# Altium PCB leo_power_pcb.PcbDoc (part 2 of 3)
Units mm, origin at the board's own origin, x right, y up, seen from the top; angles counter-clockwise.
Board outline 127 x 85.5 mm, 4 copper layers (TOP_Layer, INT1_GND, INT2_GND, BOTTOM_Layer), stack 1.586 mm thick; 172 components, 108 nets, 524 pads, 275 vias.
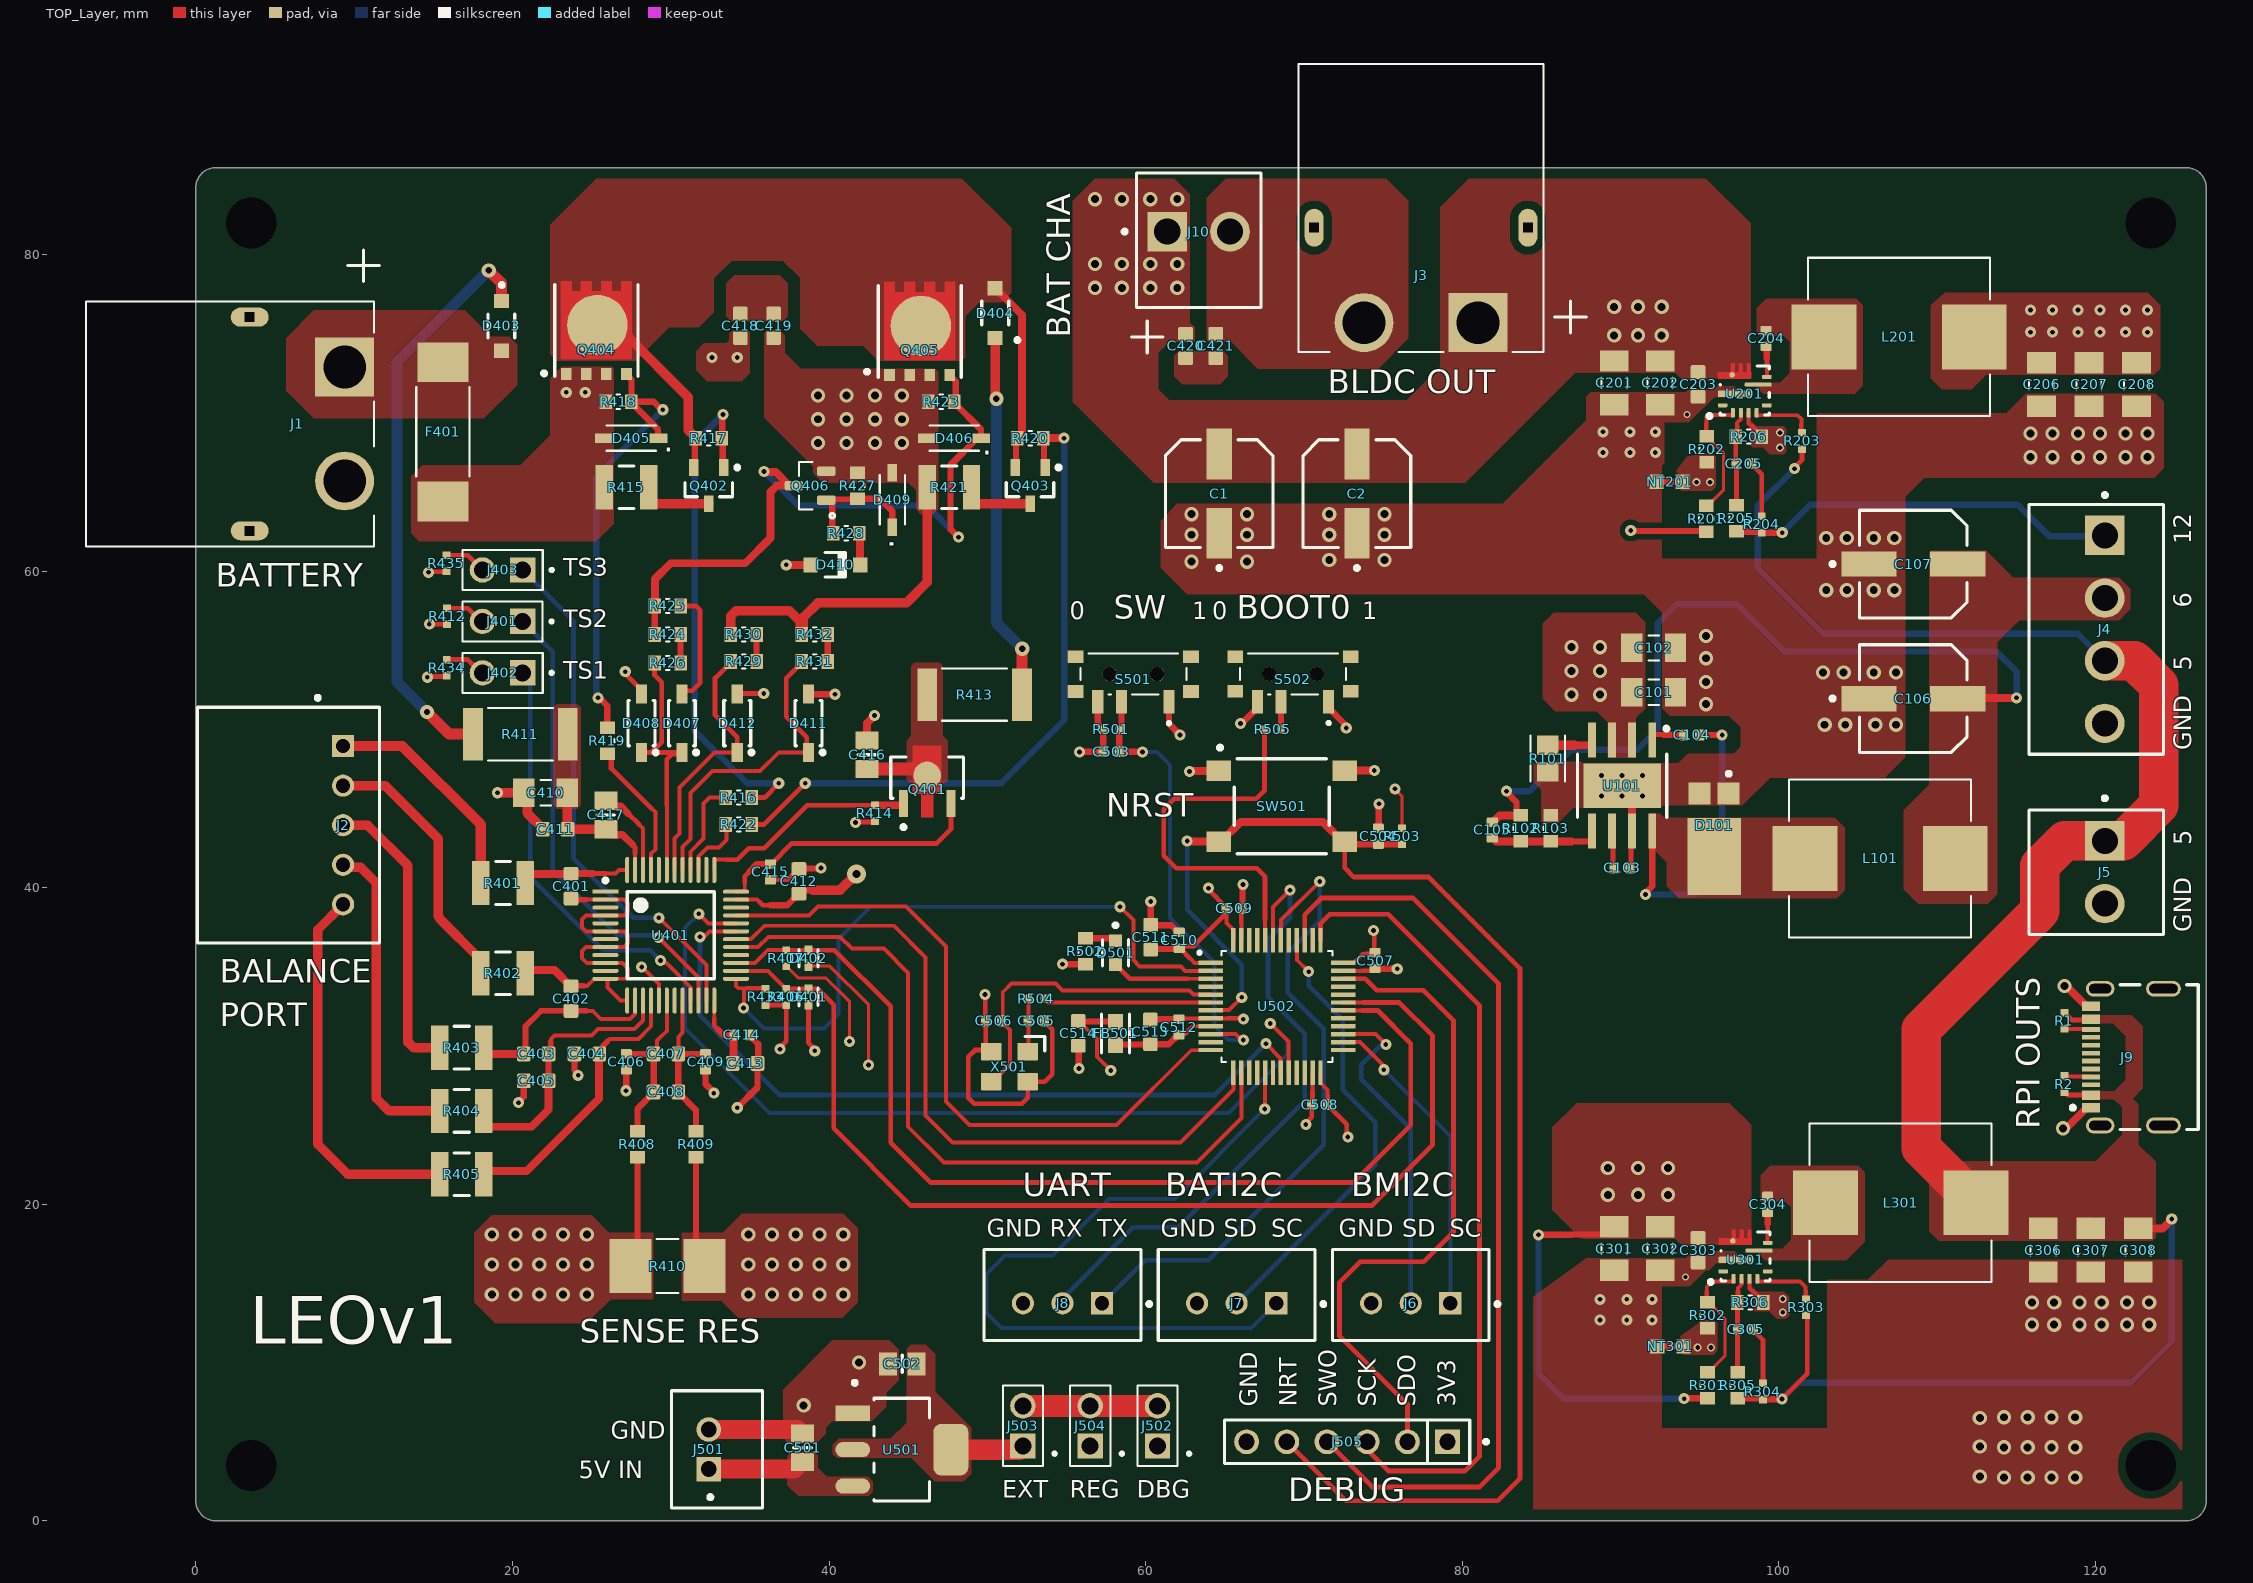
[diagram p0: TOP_Layer view]

## Part data (continued)
U201 U301: "Buck Switching Regulator IC Adjustable 0.6V~13V 1 Output 6A VQFN-10-HR(3x3)", Manufacturer="Texas Instruments", Max Junction Temp=+150°C, Max Supply Voltage=28V, Min Supply Voltage=4.5V, Nominal Supply Current=140uA, Output Current=6A, Output Voltage=0.6-13V, Package=RPA0010A, Switching Frequency=500kHz, Temperature="-40°C to +150°C", Temperature Range Low=-40°C, Automotive=No, Category=IC, ComponentLink2Description=Datasheet, ComponentLink2URL=http://www.ti.com/lit/ds/symlink/tps56637.pdf, Device Class L1="Integrated Circuits (ICs)", Device Class L2="Power Management ICs", Device Class L3="Voltage Regulators - Switching", Digikey Description="IC POWER MANAGEMENT", Height=1mm, Lead Free=Yes, Manufacturer Part Number=TPS56637RPAR, Max Duty Cycle=91%, Number Of Outputs=1, Octopart=https://octopart.com/tps56637rpar-texas+instruments-97650653, Output Type=AdjustableProgrammable, RoHS=TRUE, Standoff Height=0mm, Switching Topology=Buck, Temperature Range High=+150°C
U401: "High-precision series battery monitor and protector for 3 to 10 cells of lithium-ion, lithium-polymer, and lithium iron phosphate battery packs"
U501: library part LDO_LDL1117S33R, "IC REG LINEAR 3.3V 1.2A SOT223", Dropout Voltage=350mV, Manufacturer=STMicroelectronics, Max Junction Temp=+125°C, Max Supply Voltage=18V, Min Supply Voltage=2.6V, Nominal Supply Current=250uA, Output Current=2A, Output Voltage=3.3V, Package=SOT223-0046067, Temperature="-40°C to +125°C", Temperature Range Low=-40°C, Accuracy Percentage=2%, Automotive=No, Category=IC, ComponentLink2Description=Datasheet, ComponentLink2URL=https://www.st.com/resource/en/datasheet/ldl1117.pdf, Device Class L1="Integrated Circuits (ICs)", Device Class L2="Power Management ICs", Device Class L3="Voltage Regulators - Linear", Digikey Description="IC REG LINEAR 3.3V 1.2A SOT223", Height=1.9mm, Ipc Land Pattern Name=SOT230P700X190-4, Lead Free=Yes, Manufacturer Part Number=LDL1117S33R, Mouser Description="LDL1117 Series 1.2 A 3.3 V High PSRR LDO Linear Voltage Regulator-SOT-223", Number Of Outputs=1, Octopart=https://octopart.com/ldl1117s33r-stmicroelectronics-81876163, Output Type=Fixed, RoHS=TRUE, Standoff Height=0.02mm, Temperature Range High=+125°C
U502: "ARMÂ® CortexÂ®-M4 STM32L4 Microcontroller IC 32-Bit Single-Core 80MHz 256KB (256K x 8) FLASH 48-LQFP (7x7)", Package="LQFP-48 STMicroelectronics", Check_prices=https://www.snapeda.com/parts/STM32L431CCT6/STMicroelectronics/view-part/?ref=eda, MF=STMicroelectronics, MP=STM32L431CCT6, SnapEDA_Link=https://www.snapeda.com/parts/STM32L431CCT6/STMicroelectronics/view-part/?ref=snap
X501: library part TSX-3225_24.0000MF15X-AC, "Crystal SMD 24MHz 10PPM 7pF 3225", Manufacturer=Epson, Manufacturer Part Number="TSX-3225 24.0000MF15X-AC"

## Free pads (board coordinates)
  round 1.524 hole 3.2: MH(3.5,3.5) MH(3.5,82) MH(123.5,3.5) MH(123.5,82)

## Via types
v1: diameter 0.9, hole 0.5, TOP_Layer to BOTTOM_Layer, 147 vias
v2: diameter 0.7, hole 0.3, TOP_Layer to BOTTOM_Layer, 107 vias
v3: diameter 0.5, hole 0.3, TOP_Layer to BOTTOM_Layer, 8 vias
v4: diameter 0.63, hole 0.33, TOP_Layer to BOTTOM_Layer, 6 vias
v5: diameter 0.9, hole 0.4, TOP_Layer to BOTTOM_Layer, 4 vias
v6: diameter 0.45, hole 0.25, TOP_Layer to BOTTOM_Layer, 2 vias
v7: diameter 1.2, hole 0.5, TOP_Layer to BOTTOM_Layer, 1 vias

## Nets (pads, with @x,y where several pads share a name; then routed paths per layer and width w, separated by ;. In a path a pad name is that pad's centre, name@x,y a point inside that pad or via, vN(x,y) a via of type N, cw(c..) or ccw(c..) an arc to the next point about the centre after c; other vN are vias at no path point)
+3V3: C507.2 C508.2 C509.2 C510.2 C511.2 C514.2 FB501.2 J502.2 J503.2 J504.2 R503.2 S501.1 S502.1 U502.1 U502.24 U502.36 U502.48 | length 138.9
  TOP_Layer w0.2: v2(75.75,46.25) 75.75,46.231 76.2,45.781 R503.2@76.2,43.762
  TOP_Layer w0.25: C514.2@55.75,31.58 55.78,31.58 55.807,31.553 56.925,30.435 56.925,29.325 v2(57.8,28.45) ; 62.825,35.525 63.1,35.25 U502.1@64.12,35.25 ; 65.1,38.075 65.1,37.77 65.55,37.32 U502.48@65.55,36.68 ; U502.24@71.05,28.32 71.05,27.68 71.5,27.23 71.5,26.875 ; U502.36@72.48,35.25 73.12,35.25 73.695,35.825 73.925,35.825
  TOP_Layer w0.3: C510.2@62.125,36.175 62.275,36.325 63.05,36.325 C509.2@65.1,38.375 ; C510.2@62.215,36.135 62.825,35.525 ; v2(63.975,39.975) 63.975,39.875 65.1,38.75 C509.2@65.1,38.7 C509.2@65.1,38.375 ; 65.1,38.075 C509.2@65.1,38.375 ; 71.5,26.875 C508.2@71.5,26.3 71.5,26.25 72.7,25.05 72.7,24.325 v2(72.775,24.25) ; 73.925,35.825 74.425,35.825 C507.2@74.5,35.9 74.45,35.95 74.45,37.25 v2(74.4,37.3)
  TOP_Layer w0.4: C514.2@55.807,31.553 58.073,31.553 FB501.2@58.1,31.526 ; C511.2@60.325,36.095 60.365,36.135 C510.2@62.085,36.135 ; S501.1@61.475,51.75 61.475,50.35 v2(62.175,49.65) ; S502.1@71.56,51.754 71.56,51.354 72.618,50.296 72.618,50.157 v2(72.675,50.1)
  TOP_Layer w1.4: J503.2@52.25,7.27 J504.2@56.5,7.27 J502.2@60.75,7.27
  INT2_GND w0.3: v2(57.8,28.45) 60.425,28.45 65.425,23.45 71.975,23.45 v2(72.775,24.25) ; v2(62.175,49.65) 63.025,49.65 63.975,48.7 v2(63.975,39.975) ; v2(74.4,37.3) 66.65,37.3 v2(63.975,39.975) ; v2(75.75,46.25) 75.75,48.25 73.9,50.1 v2(72.675,50.1) 72.675,48.675 v2(63.975,39.975)
  INT2_GND w0.4: v2(57.8,28.45) 57.8,30.825 61.8,34.825 61.8,38.904 62.871,39.975 v2(63.975,39.975)
  INT2_GND w0.8: v2(57.8,28.45) 57.8,22.8 60.75,19.85 J502.2@60.75,7.27
+3V3_ADC: C512.2 C513.2 FB501.1 U502.9 | length 6.5
  TOP_Layer w0.25: 62.825,31.1 62.975,31.25 U502.9@64.12,31.25
  TOP_Layer w0.3: C512.2@62.1,30.7 62.175,30.775 62.5,30.775 62.825,31.1
  TOP_Layer w0.4: FB501.1@58.1,30.074 58.123,30.097 60.277,30.097 C513.2@60.3,30.12 61.47,30.12 62.05,30.7 C512.2@62.1,30.7
+3V3_DEBUG: J502.1 J505.1 | length 23.4
  INT2_GND w1.5: J502.1@60.75,4.681 60.75,2.629 61.629,1.75 78,1.75 79.08,2.83 J505.1@79.08,5
+3V3_EXT: C502.1 J503.1 U501.2 U501.4 | length 4.6
  TOP_Layer w1.3: U501.4@47.697,4.502 52.022,4.502 J503.1@52.25,4.73
+5V_EXT: C501.1 J501.1 U501.3 | length 6.1
  TOP_Layer w1.2: J501.1@32.4,3.275 37.775,3.275 38.225,3.725 C501.1@38.325,3.725
AGND1: NT201.2 R202.1 R206.1 U201.3 | length 1.9
  TOP_Layer w0.25: U201.3@98.1,70.01 98.1,69.335 98.277,69.158 98.332,69.158 98.92,68.57 R206.1@98.92,68.5
  other v3: 94.8,65.625 95.65,65.625 100.075,67.8 100.075,68.75
AGND2: NT301.2 R302.1 R306.1 U301.3 | length 1.9
  TOP_Layer w0.25: U301.3@98.15,15.3 98.15,14.67 98.327,14.493 98.397,14.493 99.02,13.87 R306.1@99.02,13.8
  other v3: 94.875,10.95 95.725,10.95 100.25,13.175 100.25,14.025
BAT_CHA_SCL: J7.1 U502.17 | length 46
  TOP_Layer w0.25: v2(67.525,26.025) 67.538,26.038 67.538,28.307 U502.17@67.55,28.32
  BOTTOM_Layer w0.25: v2(67.525,26.025) 61.85,20.35 57.7,20.35 54.125,16.775 51.125,16.775 49.95,15.6 49.95,13.125 50.9,12.175 66.675,12.175 J7.1@68.25,13.75
BAT_CHA_SDA: J7.2 U502.40 | length 28.6
  TOP_Layer w0.25: U502.40@69.55,36.68 69.55,35.45 v2(70.3,34.7)
  BOTTOM_Layer w0.3: J7.2@65.75,13.75 74.5,22.5 74.5,25.175 72.45,27.225 72.45,31.65 70.3,33.8 v2(70.3,34.7)
BJC_PIN1: J2.1 R401.1 | length 14.5
  TOP_Layer w0.65: J2.1@9.3,48.95 13.05,48.95 18,44 R401.1@18,40.3
BJC_PIN2: J2.2 R402.1 | length 17
  TOP_Layer w0.6: J2.2@9.3,46.45 11.95,46.45 15.3,43.1 15.3,38.2 15.4,38.1 15.4,38.05 18,35.45 R402.1@18,34.6
BJC_PIN3: J2.3 R403.1 | length 18.5
  TOP_Layer w0.6: J2.3@9.3,43.95 10.85,43.95 13.4,41.4 13.4,30.251 13.751,29.9 R403.1@15.4,29.9
BJC_PIN4: J2.4 R404.1 | length 20.5
  TOP_Layer w0.6: J2.4@9.3,41.45 9.453,41.297 10.403,41.297 11.4,40.3 11.4,26.7 12.2,25.9 R404.1@15.4,25.9
BJC_PIN5: J2.5 R405.1 | length 24.3
  TOP_Layer w0.6: J2.5@9.3,38.95 7.7,37.35 7.7,23.8 9.6,21.9 R405.1@15.4,21.9
BM_ALERT: R433.1 U401.25 U502.2 | length 42.9
  TOP_Layer w0.25: U401.25@34.125,34.25 34.125,33.8 34.275,33.65 34.775,33.65 34.625,33.5 34.625,32.425 v2(34.6,32.4) ; v2(58.375,38.8) 59.225,37.95 59.225,35.425 59.625,35.025 62.225,35.025 62.5,34.75 U502.2@64.12,34.75
  TOP_Layer w0.3: 34.775,33.65 35.962,33.65 R433.1@36,33.612
  BOTTOM_Layer w0.25: v2(34.6,32.4) 35.9,31.1 39.675,31.1 40.6,32.025 40.6,36.775 42.625,38.8 v2(58.375,38.8)
BM_BAT: C410.1 C411.2 C417.2 R411.2 U401.47 | length 8.5
  TOP_Layer w0.25: U401.47@27.75,41.125 27.75,42.15
  TOP_Layer w0.3: 27.575,42.725 27.75,42.55 27.75,42.15
  TOP_Layer w0.45: C417.2@25.9,43.7 26.25,43.35 26.95,43.35 27.575,42.725
  TOP_Layer w0.5: C410.1@23.476,46 C410.1@23.478,45.998 ; C411.2@23.478,43.702 C411.2@23.48,43.7
  TOP_Layer w0.6: C411.2@23.478,43.702 C410.1@23.478,45.998 ; C411.2@23.48,43.7 C417.2@25.9,43.7
BM_BREG: Q401.1 R414.2 U401.37 | length 14.1
  TOP_Layer w0.25: U401.37@32.75,41.125 32.75,41.774 32.751,41.775 33.525,41.775
  TOP_Layer w0.3: 33.525,41.775 34.2,41.775 34.925,42.5 35.9,42.5 38.612,45.212 R414.2@42.9,45.212
  TOP_Layer w0.45: R414.2@42.9,45.212 44.635,45.212 44.7,45.277 Q401.1@44.7,45.319
BM_BREG_BJT_C: C416.1 Q401.2 R413.1 | length 4
  TOP_Layer w0.8: C416.1@42.4,47.5 45.546,47.5 45.946,47.1 Q401.2@46.2,47.1
BM_BREG_BJT_C_R: D404.1 R413.2 | length 23.2
  TOP_Layer w0.6: D404.1@50.5,74.725 50.5,74.587 50.487,74.575 50.487,71.015 50.575,70.927 v5(50.575,70.9)
  TOP_Layer w0.7: R413.2@52.19,52.2 52.19,55.09 v5(52.2,55.1)
  BOTTOM_Layer w0.7: v5(50.575,70.9) 50.575,56.725 v5(52.2,55.1)
BM_CEETOFF: U401.29 U502.14 | length 47.8
  TOP_Layer w0.25: U401.29@34.125,36.25 35.525,36.25 36.175,36.9 40.7,36.9 41.45,36.15 43.475,36.15 45,34.625 45,24.9 47.25,22.65 63.25,22.65 66.05,25.45 U502.14@66.05,28.32
BM_CHG: R419.1 U401.45 | length 8.7
  TOP_Layer w0.25: U401.45@28.75,41.125 28.75,42.15 29.025,42.425 29.025,44.775 28.8,45
  TOP_Layer w0.3: 26.24,47.56 28.8,45
  TOP_Layer w0.35: R419.1@26,48.48 26.02,48.48 26.24,48.26 26.24,47.56
BM_CP1: C417.1 U401.46 | length 5.7
  TOP_Layer w0.25: 28,44 28.25,43.75 U401.46@28.25,41.125
  TOP_Layer w0.3: 27.3,44.7 28,44
  TOP_Layer w0.45: C417.1@25.9,45.5 26.25,45.15 26.85,45.15 27.3,44.7
BM_DCHG: U401.31 U502.19 | length 48.8
  TOP_Layer w0.25: v2(31.85,36.9) 31.936,36.986 32.186,36.986 32.45,37.25 U401.31@34.125,37.25 ; v2(67.6,30.15) 68.535,29.215 68.535,28.335 U502.19@68.55,28.32
  BOTTOM_Layer w0.3: v2(31.85,36.9) 31.85,31.925 36.875,26.9 64.35,26.9 v2(67.6,30.15)
BM_DDSG: U401.32 U502.20 | length 58
  TOP_Layer w0.25: v2(31.775,38.35) 32.375,37.75 U401.32@34.125,37.75 ; v2(67.875,31.425) 67.9,31.425 69.035,30.29 69.035,28.335 U502.20@69.05,28.32
  BOTTOM_Layer w0.25: v2(31.775,38.35) 30.9,37.475 30.9,31.125 36.25,25.775 65.25,25.775 68.95,29.475 68.95,30.35 v2(67.875,31.425)
BM_DEETOFF: U401.30 U502.13 | length 45.8
  TOP_Layer w0.25: U401.30@34.125,36.75 35.075,36.75 35.925,37.6 44.1,37.6 46.1,35.6 46.1,25.6 47.8,23.9 62.2,23.9 65.55,27.25 U502.13@65.55,28.32